# Altium PCB 2011_CurrentIntegrator2.PcbDoc
Units mm, origin at the board's own origin, x right, y up, seen from the top; angles counter-clockwise.
Board outline 95.75 x 56.86 mm, 4 copper layers (Top Layer, Ground layer, Power Layer, Bottom Layer); 113 components, 75 nets, 394 pads, 100 vias.
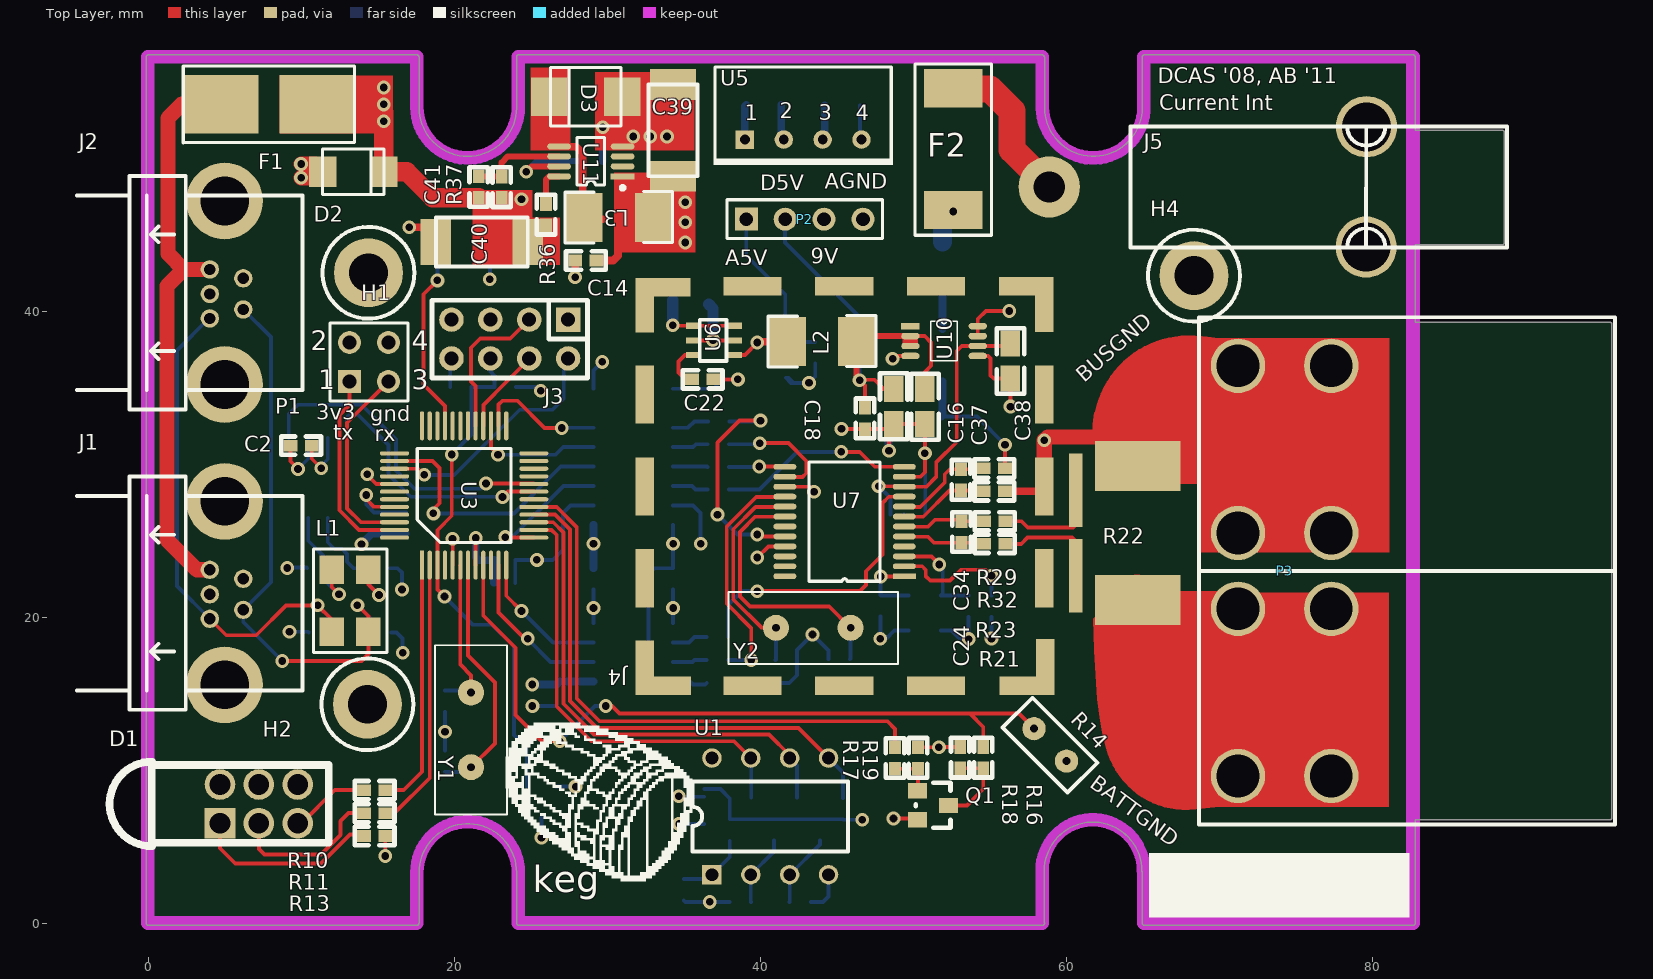
[diagram p0: Top Layer view]
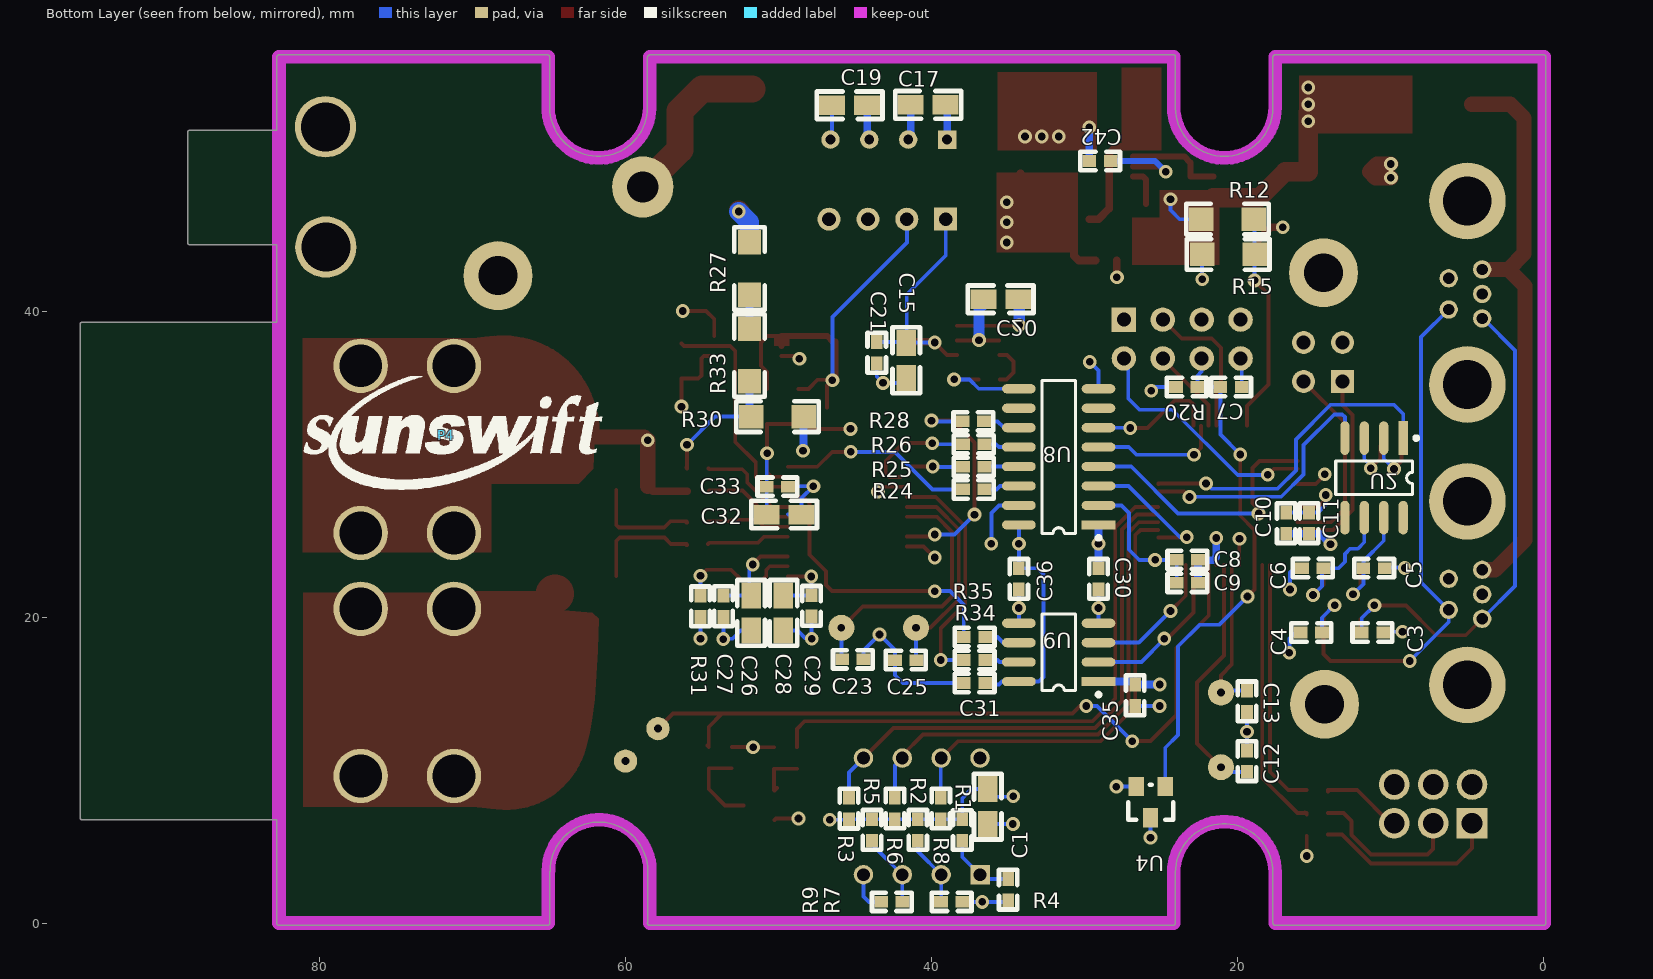
[diagram p1: Bottom Layer view, seen from below]
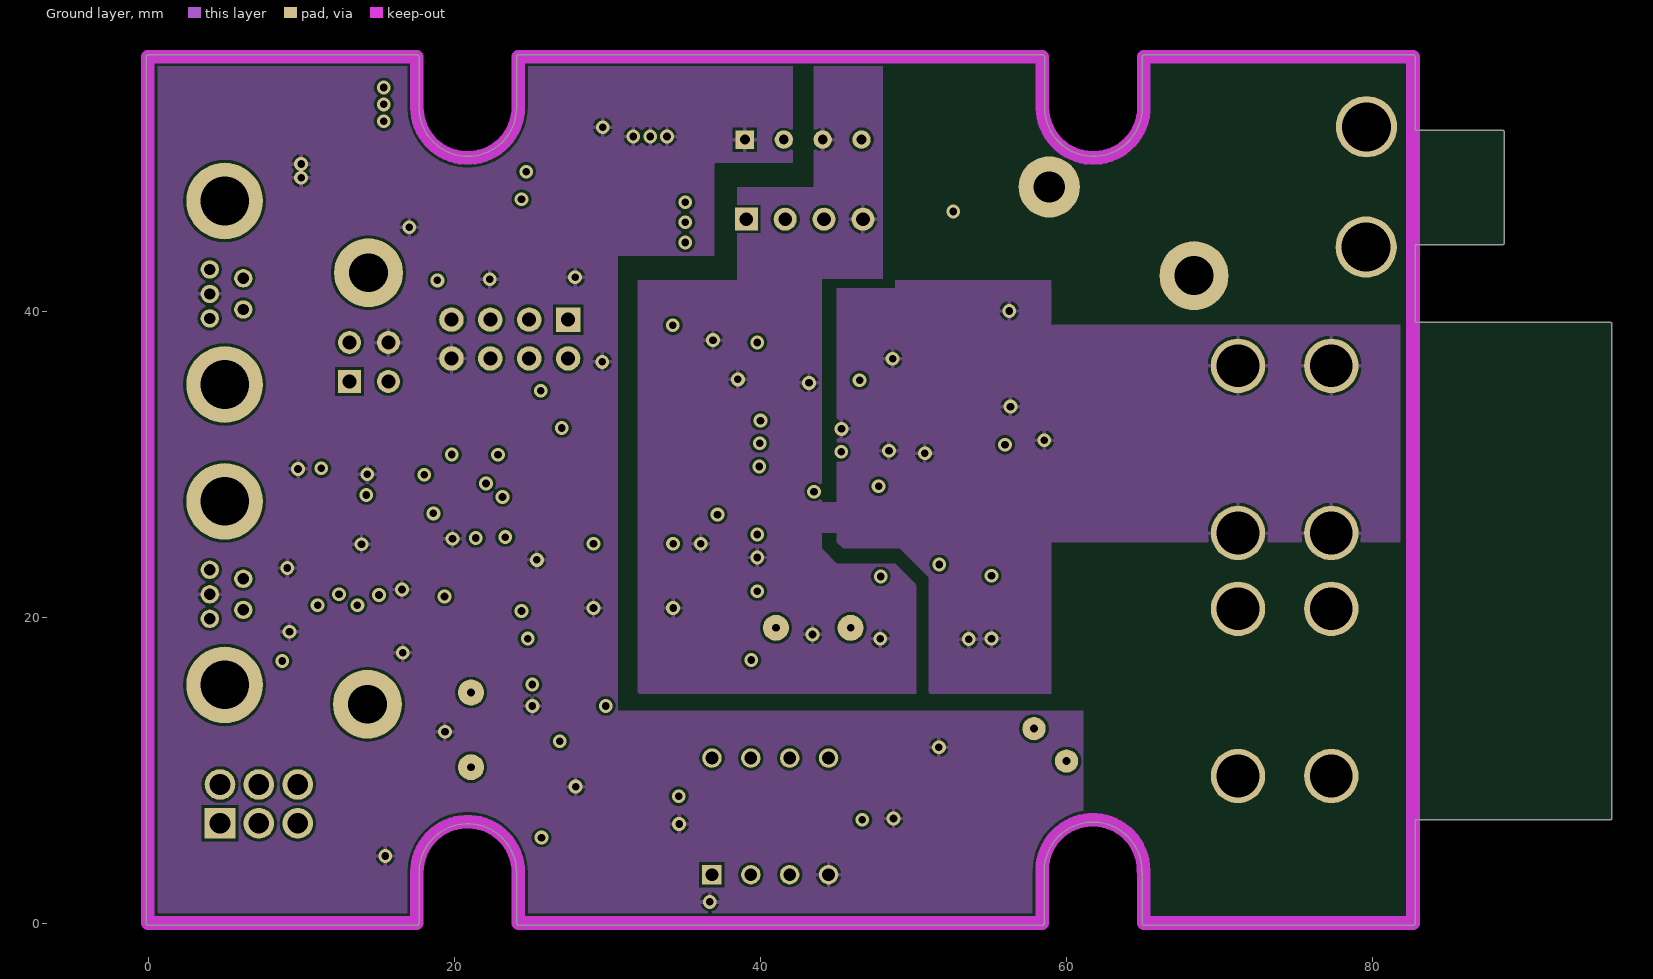
[diagram p2: Ground layer]
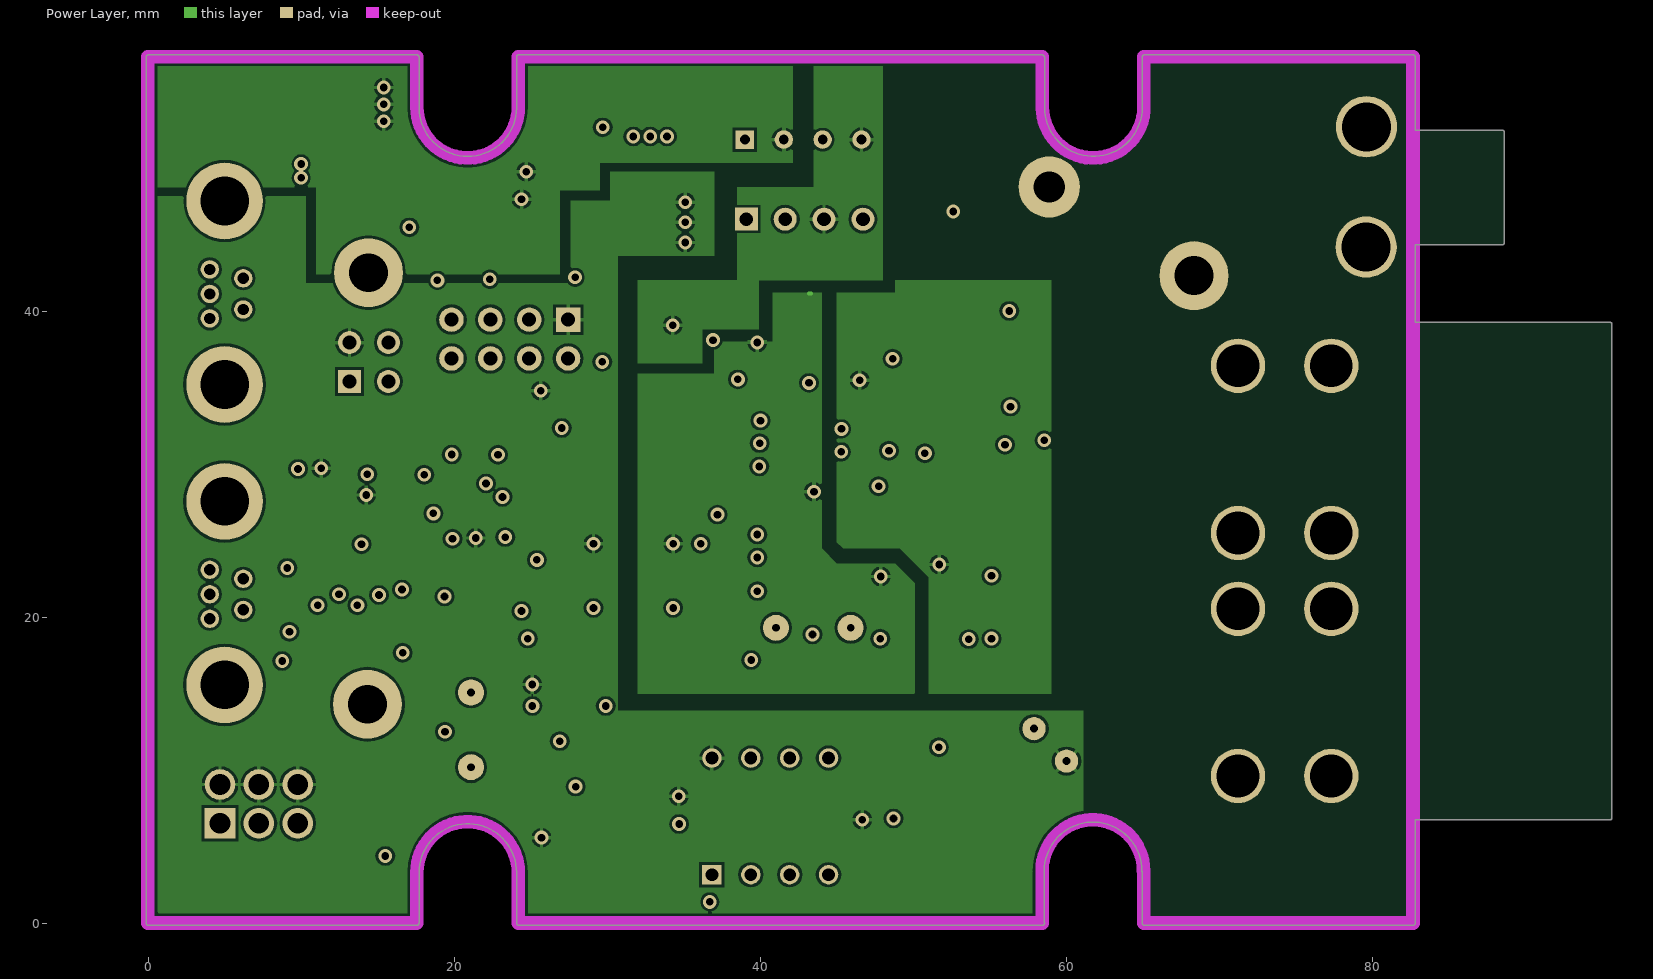
[diagram p3: Power Layer]

## Layer stack, top to bottom
Top Layer: signal copper 0.0356
Dielectric: core 0.32, FR-4, Dk 4.8
Ground layer: signal copper 0.0356
Dielectric: prepreg 0.32, FR-4, Dk 4.8
Power Layer: signal copper 0.0356
Dielectric: core 0.32, FR-4, Dk 4.8
Bottom Layer: signal copper 0.0356

## Board outline
-0.125,0.001 ccw(c0,0) 0,-0.125 17.55,-0.123 ccw(c17.575,0) 17.7,0 17.7,3.291 ccw(c17.575,3.313) 17.702,3.313 cw(c20.89,3.313) 24.077,3.313 ccw(c24.205,3.313) 24.079,3.291 24.079,0 ccw(c24.205,0) 24.205,-0.125 58.445,-0.125 ccw(c58.445,0) 58.57,0 ccw(c58.445,0) 58.545,0.075 58.545,3.313 ccw(c58.42,3.313) 58.532,3.369 ccw(c58.42,3.429) 58.547,3.429 cw(c61.735,3.429) 64.923,3.429 ccw(c65.05,3.429) 64.954,3.346 ccw(c65.075,3.313) 64.949,3.313 64.949,0 ccw(c65.075,0) 65.077,-0.125 ccw(c65.08,0) 65.08,-0.125 82.655,-0.125 ccw(c82.655,0) 82.78,0 ccw(c82.655,0) 82.777,0.028 82.777,6.758 95.504,6.758 ccw(c95.504,6.883) 95.629,6.883 95.629,39.141 ccw(c95.504,39.141) 95.504,39.267 82.777,39.267 82.777,44.325 88.468,44.325 ccw(c88.468,44.45) 88.594,44.45 88.594,51.689 ccw(c88.468,51.689) 88.468,51.814 82.777,51.814 82.777,56.603 ccw(c82.652,56.603) 82.652,56.729 65.075,56.729 ccw(c65.075,56.603) 64.949,56.603 64.949,53.316 ccw(c65.075,53.293) 64.947,53.293 cw(c61.76,53.293) 58.572,53.293 ccw(c58.445,53.293) 58.57,53.315 58.57,56.57 ccw(c58.445,56.57) 58.531,56.661 ccw(c58.42,56.603) 58.42,56.729 24.24,56.729 ccw(c24.2,56.61) 24.075,56.61 24.075,53.3 ccw(c24.2,53.3) 24.077,53.274 cw(c20.89,53.293) 17.702,53.293 ccw(c17.575,53.293) 17.7,53.316 17.7,56.603 ccw(c17.575,56.603) 17.575,56.729 0,56.729 ccw(c0,56.603) -0.125,56.603 -0.125,0.003 ccw(c0,0.003)

## Design rules (kind name [scope] priority, off if disabled: settings)
Clearance [All] p1: gap=0.18
ComponentClearance [All] p1 off: gap=0.18 collisioncheckmode=3 verticalgap=2540 showdistances=TRUE
HoleSize [All] p1: absolutevalues=TRUE maxlimit=10 minlimit=0.025 maxpercent=80.000 minpercent=20.000
HoleToHoleClearance [All] p1: gap=0.18 allowstackedmicrovias=TRUE
MinimumSolderMaskSliver [All] p1: minsoldermaskwidth=0.01
PolygonConnect [All] p1: connectstyle=Relief reliefconductorwidth=0.254 reliefentries=4 polygonreliefangle="90 Angle"
RoutingCorners [All] p1: cornerstyle=45-Degree minsetback=1 maxsetback=1
RoutingVias [All] p1: holewidth=0.5 width=0.9 viastyle="Through Hole" minholewidth=0.4 minwidth=0.4 maxholewidth=0.5 maxwidth=0.9
SilkToSilkClearance [All] p1 off: silktosilkclearance=0.254
SilkscreenOverComponentPads [All] p1 off: minsilkscreentomaskgap=0.254
SolderMaskExpansion [All] p1: expansion=0.102
TestPointUsage [All] p1: valid=0 allowmultiple=FALSE
Testpoint [All] p1: side=15 testpointundercomponent=TRUE minsize=1.016 maxsize=2.54 preferedsize=1.524 minholesize=0 maxholesize=1.016 preferedholesize=0.813 testpointgrid=0.025 style=1023 order=0123456789
Width [All] p1: maxlimit=10 minlimit=0.25 preferedwidth=0.254
17 further rules are at their usual default settings.

## Classes and differential pairs
component class U_3V-Switcher-50mA: C39 C40 C41 C42 D3 L3 R36 R37 U11
component class TopLevel: C1 D1 H1 H2 H3 H4 ID1 P1 Q1 R1 R2 R3 R4 R5 R6 R7 R8 R9 R10 R11 R12 R13 R14 R15 R16 R17 R18 R19 TP1 TP2 TP3 TP4 TP5 TP6 TP7 TP8 TP9 TP10 TP11 TP12 U1
component class MCP3909: 9V A5V C15 C16 C17 C18 C19 C20 C21 C22 C23 C24 C25 C26 C27 C28 C29 C30 C31 C32 C33 C34 C35 C36 C37 C38 F2 J4 J5 L2 P2 P3 R21 R22 R23 R24 R25 R26 R27 R28 R29 R30 R31 R32 R33 R34 R35 TP15 U5 U6 U7 U8 U9 U10 Y2
component class LPC11c14: C7 C8 C9 C10 C11 C12 C13 C14 J3 R20 U3 U4 Y1
component class 3V3-CAN-UNISOLATED: C2 C3 C4 C5 C6 D2 F1 J1 J2 L1 U2

## Components (designator, comment, footprint, x,y, rotation, side; value= is the part's Value field where it differs from the comment)
C1 "0.1uF" 0805 36.336,8.774 r270 bottom
C2 "100nF" 0603 9.3,31.2 r0 top
C3 "100nF" 0603 10.503,19 r0 bottom
C4 "100nF" 0603 14.5,19 r0 bottom
C5 "100nF" 0603 11.797,23.2 r180 bottom
C6 "100nF" 0603 14.403,23.2 r0 bottom
C7 "10nF" 0603 21.14,35.04 r180 bottom
C8 "10nF" 0603 23.993,23.742 r180 bottom
C9 "100nF" 0603 23.993,22.242 r180 bottom
C10 "10nF" 0603 16.843,25.444 r90 bottom
C11 "100nF" 0603 15.343,25.444 r90 bottom
C12 "18pF" 0603 19.4,9.9 r90 bottom
C13 "18pF" 0603 19.4,15.2 r270 bottom
C14 "100nF" 0603 29.3,43.3 r180 top
C15 "10u" 0805 41.656,35.636 r90 bottom
C16 "10u" 0805 48.717,32.625 r90 top
C17 "1uF" 0805 41.37,53.469 r180 bottom
C18 "100nF" 0603 46.838,33.68 r270 top
C19 "10u" 0805 44.215,53.443 r0 bottom
C20 "1uF" 0805 34.341,40.767 r0 bottom
C21 "100nF" 0603 43.586,37.973 r270 bottom
C22 "18pF" 0603 36.932,35.535 r180 top
C23 "18pF" 0603 45.844,17.247 r180 bottom
C24 "2.2nF" 0603 53.137,26.264 r270 top
C25 "100n" 0603 40.992,17.196 r0 bottom
C26 "10u" 0805 51.791,19.126 r90 bottom
C27 "100nF" 0603 53.594,21.412 r270 bottom
C28 "10u" 0805 49.682,19.126 r90 bottom
C29 "100nF" 0603 47.854,20.041 r90 bottom
C30 "100nF" 0603 29.1,21.803 r90 bottom
C31 "100nF" 0603 37.897,15.7 r180 bottom
C32 "10u" 0805 50.786,26.7 r180 bottom
C33 "100nF" 0603 49.378,28.524 r0 bottom
C34 "2.2nF" 0603 53.111,29.667 r270 top
C35 "100nF" 0603 26.7,14.203 r90 bottom
C36 "100nF" 0603 34.3,21.8 r90 bottom
C37 "0.1uF" 0805 50.749,34.9 r270 top
C38 "1uF" 0805 56.337,35.585 r90 top
C39 "4u7 35V" MCCT-CASEC 34.3,48.8 r90 top
C40 "4u7 35V" MCCT-CASEC 24.8,44.5 r180 top
C41 "1n" 0603 21.6,47.403 r90 top
C42 "100nF" 0603 28.3,49.8 r0 bottom
D1 "1882-2781" LED_TRILEVEL 4.699,6.529 r90 top
D2 "12V Transient Suppressor" SMA 13.4,49.1 r0 top
D3 "MBRS130" SMB 28.6,54 r180 top
F1 "125mA/3A" LITTELFUSE-154 7.9,53.5 r0 top
F2 "125mA/3A" LITTELFUSE-154-250V 50.55,45.05 r90 top
H1 "HOLE" M2.5 14.4,42.5 r0 top
H2 "HOLE" M2.5 14.33,14.31 r0 top
H4 "HOLE" M2.5 68.33,42.31 r0 top
J1 "CON5-S" TRIAD5F 6.219,22.509 r90 top
J2 "CON5-S" TRIAD5F 6.219,42.134 r90 top
J3 "LPC SWD Connector" IDC8 27.44,39.44 r180 top
J4 "Shield" BMIS-203-SHIELD 59.15,42.215 r180 top locked
J5 "POWERPOLE(MINI)" POWERPOLE25A 45.283,48.107 r270 top
L1 "CHOKE" Epcos-Choke 12,23.1 r0 top
L2 "CHOKE" 1812 41.779,37.998 r0 top
L3 "330uH" 1812 28.5,46.1 r0 top
P1 "UART" HDR2X2 13.16,35.4 r0 top
P2 "Header 4" HDR1X4 39.08,46 r0 top
P3 "MiniPowerclaw" MiniPowerpole-Hrz 71.204,20.547 r0 top (schematic designator P1)
P4 "SUN_LOGO" SUNSWIFTLOGO 71.7,31.9 r180 bottom (schematic designator P1)
Q1 "ZXM61N02F" SOT23-3 50.268,8.665 r270 top
R1 "0R" 0603 38,5.397 r90 bottom
R2 "0R" 0603 40.9,5.4 r90 bottom
R3 "0R" 0603 45.4,8.197 r270 bottom
R4 "0R" 0603 35,1.5 r90 bottom
R5 "0R" 0603 43.9,5.4 r90 bottom
R6 "0R" 0603 42.4,8.2 r270 bottom
R7 "0R" 0603 38,1.4 r0 bottom
R8 "0R" 0603 39.4,8.2 r270 bottom
R9 "0R" 0603 43.297,1.4 r180 bottom
R10 "1K" 0603 14.1,8.7 r0 top
R11 "1K" 0603 14.103,7.2 r0 top
R12 "100K" 1206 18.971,46 r0 bottom
R13 "1K" 0603 14.1,5.7 r0 top
R14 "NTC, 10k" NTC_EPCOS 60,10.6 r135 top
R15 "20K" 1206 22.329,43.7 r180 bottom
R16 "9k1" 0603 54.556,11.523 r270 top
R17 "100R" 0603 48.8,10.1 r90 top
R18 "0R" 0603 53.056,11.523 r270 top
R19 "10K" 0603 50.3,10.103 r90 top
R20 "10k" 0603 22.64,35.04 r0 bottom
R21 "7k15" 0603 54.61,24.79 r0 top
R22 "BVR, 0R0005" BVR 60.15,36.5 r270 top
R23 "7k15" 0603 54.61,26.264 r0 top
R24 "0R" 0603 37.948,28.346 r180 bottom
R25 "0R" 0603 37.948,29.82 r180 bottom
R26 "0R" 0603 37.948,31.293 r180 bottom
R27 "330k" 1206 51.9,41.071 r90 bottom
R28 "0R" 0603 37.973,32.791 r180 bottom
R29 "7k15" 0603 54.585,29.718 r0 top
R30 "1k2" 1206 48.371,33.1 r0 bottom
R31 "1k" 0603 55.1,21.4 r270 bottom
R32 "7k15" 0603 54.585,28.219 r0 top
R33 "330k" 1206 51.9,35.4 r90 bottom
R34 "0R" 0603 37.897,17.2 r180 bottom
R35 "0R" 0603 37.897,18.7 r180 bottom
R36 "100k" 0603 26,47 r270 top
R37 "1R2" 0603 23.1,47.4 r90 top
U1 "24AA256" DIP8 36.836,3.174 r90 top
U2 "SN65HVD232" SO8 11.1,29.1 r0 bottom
U3 "LPC11C14" Quad48-LPC11c14 17.9,23.4 r90 top
U4 "XC61CN2002MR" SOT23-3 24.735,8.932 r0 bottom
U5 "NKE1209SC" NPSIP4 42.8,51.2 r0 top
U6 "Pq1R30" SOT23-6 35.685,39.035 r270 top
U7 "MCP3909" SOP24-wide 49.403,22.673 r180 top
U8 "IL717" SO16 31.7,30.475 r90 bottom
U9 "IL711" SO8 31.7,17.7 r90 bottom
U10 "LTC6652" "SOP8 - duplicate" 49.804,39.014 r0 top
U11 "LTC1474" TSOP8 31,48.8 r180 top
Y1 "12 MHz" HC49/4H#1 21.1,18.165 r270 top
Y2 "3.579545" HC49/4H#2 37.933,19.304 r0 top

## Footprints (in the part's own frame and the unit in brackets; to place one, negate y for a bottom-side part, rotate by r counter-clockwise, add the part's x,y. Pads: shape width x height; smd on the part's side, far side on the other; paste and mask are expansions set on the pad)
0603 [mil]
  rect 35.43x30 smd: 1(0,0) 2(55,0)
  silkscreen extent -24,-24 79,24
0805 [mm]
  rect 1.7x1.27 smd: 1(0,0) 2(2.286,0)
  silkscreen extent -1,-0.9 3.3,0.9
1206 [mil]
  rect 62.99x60 smd: 1(0,0) 2(135,0)
  silkscreen extent -39,-39 173,39
1812 [mm]
  rect 2.4x3.2 smd: 1(0,0) 2(4.5,0)
  silkscreen extent -1.27,-1.66 5.77,1.7
BMIS-203-SHIELD [mm]
  rect 3.8x1.2 smd: 1(13.67,0.6) ""(7.67,26.7) ""(7.67,0.6) ""(13.67,26.7) ""(19.67,26.7) ""(19.67,0.6)
  rect 1.2x3.57 smd: ""(0.55,25.415) ""(0.6,1.785) ""(26.7,25.515) ""(26.7,1.835)
  rect 1.2x3.8 smd: ""(0.6,19.67) ""(0.6,13.67) ""(0.6,7.67) ""(26.7,7.67) ""(26.7,13.67) ""(26.7,19.67)
  rect 3.57x1.2 smd: ""(1.735,26.7) ""(1.785,0.6) ""(25.465,26.7) ""(25.5,0.65)
BVR [mm]
  rect 4.8x0.9 smd: 1(13.8,0.45) 2(8.2,0.45)
  rect 3.25x5.6 smd: 3(15.375,4.5) 4(6.625,4.5)
DIP8 [mil]
  rect 50x50 hole 33: 1(0,0)
  round 50 hole 33: 2(0,-100) 3(0,-200) 4(0,-300) 5(300,-300) 6(300,-200) 7(300,-100) 8(300,0)
  silkscreen extent 60,-350 240,50
Epcos-Choke [mm]
  rect 1.6x1.85 smd paste+0: 1(0,-4.05)
  rect 1.6x1.85 smd: 2(2.4,-4.05) 3(2.4,0) 4(0,0)
  silkscreen extent -1.2,-5.4 3.6,1.35
HC49/4H#1 [mm]
  round 1.7 hole 0.508: 1(3.085,0) 2(7.965,0)
  silkscreen extent 0,-2.35 11.05,2.35
HC49/4H#2 [mm]
  round 1.7 hole 0.5: 1(3.085,0) 2(7.965,0)
  silkscreen extent 0,-2.35 11.05,2.35
HDR1X4 [mm] "Connector; Header; 4 Position"
  rect 1.5x1.5 hole 0.9: 1(0,0)
  round 1.5 hole 0.9: 2(2.54,0) 3(5.08,0) 4(7.62,0)
  silkscreen extent -1.27,-1.27 8.89,1.27
HDR2X2 [mm] "Connector; Header; 2x2 Position"
  rect 1.5x1.5 hole 0.9: 1(0,0)
  round 1.5 hole 0.9: 2(0,2.54) 3(2.54,0) 4(2.54,2.54)
  silkscreen extent -1.27,-1.27 3.81,3.81
IDC8 [mm]
  rect 1.6x1.6 hole 0.914: 1(0,0)
  round 1.6 hole 0.914: 2(0,2.54) 3(2.54,0) 4(2.54,2.54) 5(5.08,0) 6(5.08,2.54) 7(7.62,0) 8(7.62,2.54)
  silkscreen extent -1.27,-1.27 8.89,3.81
LED_TRILEVEL [mm]
  rect 2x2 hole 1.346: 1(0,0)
  round 2 hole 1.346: 2(0,-2.54) 3(0,-5.08) 4(2.54,-5.08) 5(2.54,-2.54) 6(2.54,0)
  silkscreen extent -1.49,-7.11 4.03,7.21
LITTELFUSE-154 [mm]
  rect 5x3.81 smd: 1(-3.185,0) 2(3.185,0)
  silkscreen extent -5.6,-2.51 5.6,2.5
LITTELFUSE-154-250V [mm]
  rect 2.5x3.81 smd: 1(1.55,-2.05) 2(9.5,-2.05)
  silkscreen extent -0.1,-4.56 11.1,0.45
M2.5 [mm]
  round 4.5 hole 2.54: 1(0,0)
  silkscreen extent -3,-3 3,3
MCCT-CASEC [mm]
  rect 2x3 smd: 1(0,0) 2(6,0)
  silkscreen extent 0,-1.6 6,1.6
MiniPowerpole-Hrz [mil]
  round 140 hole 110: 1(0,195) 1(0,625) 1(240,195) 1(240,625) 2(0,-430) 2(0,0) 2(240,-430) 2(240,0)
  silkscreen extent -100,-555 970,750
NPSIP4 [mm]
  rect 1.2x1.2 hole 0.635: 1(-3.81,0)
  round 1.2 hole 0.635: 2(-1.27,0) 3(1.27,0) 4(3.81,0)
  silkscreen extent -5.85,-1.65 5.86,4.75
NTC_EPCOS [mil]
  round 60 hole 20: 1(0,0) 2(118.11,0)
  silkscreen extent -59,-53 177,55
POWERPOLE25A [mm]
  round 4 hole 2.032: 1(0,13.589)
  silkscreen extent -3.95,18.9 3.95,43.5
Quad48-LPC11c14 [mm]
  rect 1.9x0.27 smd: 1(0,0)
  oval 1.9x0.27 smd: 2(0,-0.5) 3(0,-1) 4(0,-1.5) 5(0,-2) 6(0,-2.5) 7(0,-3) 8(0,-3.5) 9(0,-4) 10(0,-4.5) 11(0,-5) 12(0,-5.5) 25(9.1,-5.5) 26(9.1,-5) 27(9.1,-4.5) 28(9.1,-4) 29(9.1,-3.5) 30(9.1,-3) 31(9.1,-2.5) 32(9.1,-2) 33(9.1,-1.5) 34(9.1,-1) 35(9.1,-0.5) 36(9.1,0)
  oval 0.27x1.9 smd: 13(1.8,-7.3) 14(2.3,-7.3) 15(2.8,-7.3) 16(3.3,-7.3) 17(3.8,-7.3) 18(4.3,-7.3) 19(4.8,-7.3) 20(5.3,-7.3) 21(5.8,-7.3) 22(6.3,-7.3) 23(6.8,-7.3) 24(7.3,-7.3) 37(7.3,1.8) 38(6.8,1.8) 39(6.3,1.8) 40(5.8,1.8) 41(5.3,1.8) 42(4.8,1.8) 43(4.3,1.8) 44(3.8,1.8) 45(3.3,1.8) 46(2.8,1.8) 47(2.3,1.8) 48(1.8,1.8)
  silkscreen extent 1.48,-5.81 7.61,0.32
SMA [mm]
  rect 1.8x2 smd: A(-2,0) K(2,0)
  silkscreen extent -2,-1.48 2,1.48
SMB [mm]
  rect 2.4x2.5 smd: A(-2.385,0) K(2.385,0)
  silkscreen extent -2.28,-1.9 2.3,1.9
SO8 [mm]
  rect 0.6x2.2 smd: 1(-1.905,-2.6)
  oval 0.6x2.2 smd: 2(-0.635,-2.6) 3(0.635,-2.6) 4(1.905,-2.6) 5(1.905,2.6) 6(0.635,2.6) 7(-0.635,2.6) 8(-1.905,2.6)
  silkscreen extent -2.88,-2.72 2.5,1.1
SO16 [mm]
  rect 0.6x2.2 smd: 1(-4.445,-2.6)
  oval 0.6x2.2 smd: 2(-3.175,-2.6) 3(-1.905,-2.6) 4(-0.635,-2.6) 5(0.635,-2.6) 6(1.905,-2.6) 7(3.175,-2.6) 8(4.445,-2.6) 9(4.445,2.6) 10(3.175,2.6) 11(1.905,2.6) 12(0.635,2.6) 13(-0.635,2.6) 14(-1.905,2.6) 15(-3.175,2.6) 16(-4.445,2.6)
  silkscreen extent -5.42,-2.72 5,1.1
"SOP8 - duplicate" [mm]
  rect 1.2x0.42 smd: 1(0,0)
  oval 1.2x0.42 smd: 2(0,-0.65) 3(0,-1.3) 4(0,-1.95) 5(4.4,-1.95) 6(4.4,-1.3) 7(4.4,-0.65) 8(4.4,0)
  silkscreen extent 1.33,-2.28 3.07,0.33
SOP24-wide [mm]
  rect 1.5x0.38 smd: 1(0,0)
  oval 1.5x0.38 smd: 2(0,-0.65) 3(0,-1.3) 4(0,-1.95) 5(0,-2.6) 6(0,-3.25) 7(0,-3.9) 8(0,-4.55) 9(0,-5.2) 10(0,-5.85) 11(0,-6.5) 12(0,-7.15) 13(7.8,-7.15) 14(7.8,-6.5) 15(7.8,-5.85) 16(7.8,-5.2) 17(7.8,-4.55) 18(7.8,-3.9) 19(7.8,-3.25) 20(7.8,-2.6) 21(7.8,-1.95) 22(7.8,-1.3) 23(7.8,-0.65) 24(7.8,0)
  silkscreen extent 1.58,-7.48 6.22,0.33
SOT23-3 [mm]
  rect 1x1.25 smd: 1(0,0) 2(1.905,0) 3(0.965,2.032)
  silkscreen extent -0.51,-0.13 2.41,2.16
SOT23-6 [mm]
  rect 0.4x0.9 smd: 1(0,-0.1) 2(0.95,-0.1) 3(1.9,-0.1) 4(1.9,2.65) 5(0.95,2.65) 6(0,2.65)
  silkscreen extent -0.4,0.35 2.3,2.1
SUNSWIFTLOGO [mm] "Sunswift Logo"
  silkscreen extent -9.32,-3.58 10.19,3.81
TRIAD5F [mil]
  round 196.85 hole 125: 0(-273,48) 0(199,48)
  round 47.24 hole 29: 1(0,0) 2(23,86) 3(-40,86) 4(-103,86) 5(-80,0)
  silkscreen extent -337,-152 263,428
TSOP8 [mm]
  rect 1.55x0.4 smd: 1(0,0)
  oval 1.55x0.4 smd: 2(0,-0.65) 3(0,-1.3) 4(0,-1.95) 5(4.15,-1.95) 6(4.15,-1.3) 7(4.15,-0.65) 8(4.15,0)
  silkscreen extent -0.13,-2.52 2.98,0.87

## Part data
C1 C2 C3 C4 C5 C6 C7 C8 C9 C10 C11 C12 C13 C14 C15 C16 C17 C18 C19 C20 C21 C22 C23 C24 C25 C26 C27 C28 C29 C30 C31 C32 C33 C34 C35 C36 C37 C38 C41 C42: library part CAP, "Capacitor"
C39 C40: library part "Cap Pol3", "Polarized Capacitor (Surface Mount)"
D1: library part LED-TRILEVEL, "Three level LED"
D2: library part DIODE, "Diode"
D3: library part "D SCHOTTKY", "Schottky Diode"
F1 F2: library part FUSE2, "Fuse"
H1 H2 H4: "Hole"
J1 J2: "Connector, 2 pin, with shield @ S"
J3: library part LPCLink_Connector
J4: library part Socket, "Socket"
J5: library part CON1
L2: library part INDUCTOR, "Inductor"
L3: library part Inductor, "Inductor"
P1: library part "Header 2X2", "Header, 2-Pin, Dual row"
P2: "Header, 4-Pin"
P3: library part SUN_LOGO
Q1: "1.7A, 20V N-Channel Enhancement mode FET"
R1 R2 R3 R4 R5 R6 R7 R8 R9 R10 R11 R12 R13 R15 R16 R17 R18 R19 R20 R21 R23 R24 R25 R26 R28 R29 R30 R31 R32 R34 R35 R36 R37: library part RES1, "Resistor"
R14: library part "Res Varistor", "Varistor (Voltage-Sensitive Resistor)"
R22: library part BVR
R27 R33: library part RES1
U2: "3.3V CAN Transciever"
U3: library part LPC11C14_Full
U4: library part XC61F, "SOT23 reset generator"
U5: library part LME1209S, "Isolated 250mW Single Output"
U7: "Energy Measurement IC"
U8: "Isoloop IL717 - www.nve.com"
U9: "IL711 Optical Isolator"
U11: "Step-down converter"
Y1 Y2: library part CRYSTAL, "Crystal"

## Free pads (board coordinates)
  round 4 hole 3.2: 0(79.574,44.177) 0(79.6,52.036)

## Via types
v1: diameter 0.9, hole 0.5, Top Layer to Bottom Layer, 95 vias
v2: diameter 0.9, hole 0.5, Top Layer to Bottom Layer, tented both sides, 5 vias

## Nets (pads, with @x,y where several pads share a name; then routed paths per layer and width w, separated by ;. In a path a pad name is that pad's centre, name@x,y a point inside that pad or via, vN(x,y) a via of type N, cw(c..) or ccw(c..) an arc to the next point about the centre after c; other vN are vias at no path point)
2V5REF: C32.2 C33.1 C38.2 U7.10 U10.6 | length 20.4
  Top Layer w0.25: v1(47.727,28.55) 49.376,28.55 U7.10 50.85,28.523 51.486,29.159 51.486,30.099 52.832,31.445 52.832,37.389 53.158,37.714 U10.6 56.18,37.714 C38.2
  Bottom Layer w0.25: C32.2 48.5,27.776 v1(47.727,28.55) 49.352,28.55 C33.1 ; 49.352,26.695 49.378,26.721
3V3: C1.1 C2.2 C8.2 C9.2 C10.2 C11.2 C14.1 C30.2 C35.2 C39.1 D1.4 D1.5 D1.6 J3.1 L3.2 P1.2 R1.2 R2.2 R3.2 R5.2 R6.2 R8.2 R14.1 R20.2 U1.8 U2.3 U3.8 U3.44 U4.3 U8.1 U9.1 U11.1 | length 48.9
  Top Layer w0.25: C2.2 10.697,30.349 v1(11.32,29.725) ; v1(14.255,27.983) 14.255,27.709 14.756,27.209 16.091,27.209 U3.44 ; U3.8 21.4,25.167 v1(21.404,25.171)
  Top Layer w0.5: C14.1 30.4,43.3 30.7,43.6 30.7,45.4 31.4,46.1 L3.2 33.7,46.1 34.7,47.1 v1(35.1,47.1) ; C39.1@34,48.8 C39.1@34.2,49
  Bottom Layer w0.25: v1(11.32,29.725) 11.32,29.903 11.735,30.317 U2.3 ; v1(14.255,27.983) 14.255,27.349 14.764,26.841 C11.2 C10.2 ; R20.2 25.412,35.04 v1(25.654,34.798) ; v2(25.7,5.6) U4.3 ; v2(34.668,8.304) 34.698,8.274 C1.1@36.336,8.274 ; C1.1 37.387,8.774 38,8.161 R1.2 45.394,6.794 45.421,6.767 v1(46.657,6.767)
  Bottom Layer w0.5: v1(21.404,25.171) 21.404,23.935 21.615,23.724 22.578,23.724 C8.2 C9.2 ; v1(25.1,15.6) C35.2 26.895,15.795 U9.1 ; C30.2 U8.1 v1(29.1,24.8)
  other v1: 35.1,44.479 35.1,45.8
9V: C19.2 C20.1 P2.3 U5.4 U6.1 U6.6 | length 8
  Top Layer w0.25: v1(34.28,39.065) 34.31,39.035 U6.1 U6.6
  Bottom Layer w0.25: C19.2 46.501,51.309 U5.4
  Bottom Layer w0.75: v1(34.28,39.065) C20.1@34.28,40.706
12V: C17.1 C40.1 C41.1 C42.1 D2.K F1.2 R12.2 R36.2 R37.1 U5.2 U11.7 | length 30
  Top Layer w0.4: R37.1 24.4,47.4 v1(24.4,47.3) ; v1(24.7,49.1) 25.05,49.45 U11.7
  Top Layer w1.25: F1.2@12.599,52.7 11.799,53.5 F1.2 14.9,53.5 15.4,53 D2.K 16.9,49.1 18.597,47.403 C41.1
  Bottom Layer w0.25: R12.2 23.8,46 24.4,46.6 v1(24.4,47.3)
  Bottom Layer w0.4: v1(24.7,49.1) 25.4,49.8 C42.1
  Bottom Layer w0.5: C17.1 41.37,51.36 U5.2
  other v1: 15.4,52.4 15.4,53.5 15.4,54.6
12V_MEASURE: R12.1 R15.2 U3.33 | length 14.5
  Top Layer w0.25: v1(18.9,42) 18,41.1 18,35.2 19.4,33.8 U3.33
  Bottom Layer w0.25: v1(18.9,42) R15.2 18.9,45.929 R12.1
/RESET: C7.1 J3.6 R20.1 U3.3 U4.1 | length 33.7
  Top Layer w0.25: v1(19.369,21.347) 18.9,21.816 U3.3 18.9,25.682 19.841,26.623 v1(19.841,30.626)
  Bottom Layer w0.25: v1(19.369,21.347) 21.216,19.5 22.5,19.5 23.9,18.1 23.9,12.3 24.735,11.465 U4.1 ; v1(19.841,30.626) 21.14,31.926 C7.1 R20.1 22.64,35.76 22.36,36.04 J3.6
A5V: C16.2 C18.1 C26.2 C27.1 C37.1 L2.2 P2.2 U7.3 U10.2 U10.3 | length 35.1
  Top Layer w0.25: C18.1 46.838,35.128 v1(46.482,35.484) 46.457,35.509 47.447,35.509 48.045,34.911 C16.2 ; U7.3@49.403,23.958 51.175,23.958 v1(51.689,23.444) ; U10.2 50.739,38.364 51.156,37.948 51.156,36.424 50.749,36.017 C37.1
  Top Layer w0.381: v1@46.457,35.509 46.279,35.687 L2.2 46.457,37.998 46.823,38.364 U10.2 U10.3 U10.3@49.799,37.719
  Bottom Layer w0.25: P2.2 41.62,44.48 46.482,39.618 v1(46.482,35.484) ; v1(51.689,23.444) 51.918,23.216 51.918,21.539 C26.2 C27.1
CAN_H: C3.2 J1.4 J2.4 L1.1 | length 34
  Top Layer w0.25: J1.4 5.113,18.815 7.064,18.815 9.02,20.772 v1(11.077,20.772) 12,19.849 L1.1
  Bottom Layer w0.25: J1.4 1.882,22.046 1.882,37.43 3.969,39.518 J2.4 ; v1(11.077,20.772) 11.9,19.949 C3.2
CAN_L: C4.1 J1.5 J2.5 L1.2 | length 37
  Top Layer w0.25: v1(8.764,17.139) 13.943,17.139 14.4,17.597 L1.2 14.4,20.06 v1(13.676,20.784)
  Bottom Layer w0.25: J2.5 8.027,38.294 8.027,22.285 J1.5 6.219,19.685 v1(8.764,17.139) ; v1(13.676,20.784) 14.5,19.96 C4.1
D5V: C15.2 C21.1 C28.2 C29.2 C31.2 C36.2 L2.1 P2.1 U6.4 U7.1 U7.15 U8.16 U9.8 | length 38.9
  Top Layer w0.25: U6.4 38.989,37.135 v1(39.802,37.948) ; U7.15 43.232,28.523 43.5,28.255 v1(43.5,28.2) ; v1(47.858,22.658) U7.1@49.403,22.658
  Top Layer w0.5: v1(39.802,37.948) 39.853,37.998 L2.1
  Power Layer w0.25: 43.18,41.148 43.307,41.148
  Bottom Layer w0.25: U8.16 v1(34.3,24.8) C36.2 33.097,23.197 32.7,22.8 32.7,16.1 33.005,15.795 U9.8 35.405,15.795 35.6,15.6 36.4,15.6 C31.2 ; P2.1 39.08,43.62 41.631,41.069 C15.2@41.631,37.948 ; v1(39.802,37.948) C15.2@41.631,37.948 ; C21.1 41.707,37.973 C15.2 C15.2@41.631,37.948 ; v1(47.858,22.658) C29.2@47.858,21.442 ; C29.2@47.904,21.488 C29.2@47.858,21.442 ; C28.2 47.879,21.412 C29.2 C29.2@47.858,21.442
GND: C1.2 C2.1 C3.1 C4.2 C5.2 C6.2 C7.2 C8.1 C9.1 C10.1 C11.1 C12.2 C13.2 C14.2 C17.2 C30.1 C35.1 C39.2 C40.2 C42.2 D2.A D3.A J1.3 J2.3 J3.8 P1.4 Q1.2 R4.1 R7.1 R9.1 R13.2 R15.1 R18.1 R19.2 U1.4 U2.2 U3.5 U3.41 U4.2 U5.1 U8.2 U8.8 U9.4 U11.4 | length 64.1
  Top Layer w0.25: C2.1 9.3,30.184 v1(9.8,29.684) ; v1(14.326,29.337) 14.326,29.286 14.912,28.7 U3.41 ; R13.2 15.5,5.697 v1(15.5,4.4) ; v1(19.888,25.121) 19.914,25.095 19.9,25.082 U3.5 ; v1(29.667,36.678) v1@29.693,36.678 ; v1(48.696,6.85) 50.178,6.85 Q1.2 ; R19.2 v1(51.664,11.5) 51.668,11.503 51.687,11.523 R18.1
  Top Layer w0.5: v1(17.069,45.466) 17.834,45.466 C40.2 ; v1(27.9,42.2) 27.903,42.203 C14.2
  Top Layer w1: v1(10,48.7) 11,48.7 D2.A 10.9,49.6 v1(10,49.6) ; D2.A@11.2,49.3 D2.A@11.3,49.2
  Bottom Layer w0.25: v1(9.236,19.051) 10.452,19.051 C3.1 ; v1@9.296,23.251 10.349,23.251 C5.2 C5.2@10.337,23.263 ; v1(9.8,29.684) 10.465,30.349 U2.2 ; C6.2 16.297,23.2 16.588,22.909 v1(16.588,21.807) ; C4.2 16.233,19 16.632,18.601 v1(16.632,17.673) ; v1(19.394,12.517) v1@19.4,12.511 ; C12.2 v1@19.4,12.511 ; C13.2 v1@19.4,12.511 ; C7.2 19.743,36.823 J3.8 ; v1(22.329,42.081) R15.1 ; C9.1 C8.1 v1(25.4,23.742) 26.442,23.742 27.1,24.4 27.1,26.8 27.6,27.3 U8.2 ; v1(25.106,14.2) 25.103,14.203 C35.1 ; U4.2 v2(27.932,8.932) ; U9.4 v1(29.1,20.6) C30.1 ; U8.8 29.1,36.11 v1(29.667,36.678) ; v2(34.691,6.488) C1.2 ; R4.1 35.1,1.4 v1(36.7,1.4) R7.1 ; C17.2@39.083,53.469 C17.2@39.114,53.5 ; R9.1 44.1,1.4 44.456,1.756 U1.4
  Bottom Layer w0.5: v1(13.945,24.765) 14.623,25.444 C10.1 ; C42.2 29.7,49.803 v1(29.7,52) ; U5.1 38.99,53.374 C17.2
  other v1: 9.093,23.216 31.7,51.4 32.8,51.4 33.9,51.4
ISOGND: C15.1 C16.1 C18.2 C19.1 C20.2 C21.2 C22.1 C23.2 C25.2 C26.1 C27.2 C28.1 C29.1 C31.1 C32.1 C33.2 C36.1 C37.2 C38.1 J4.@58.55,28.545 P2.4 P3.1 R22.4 R30.1 R31.2 R32.2 U5.3 U6.2 U6.5 U7.11 U7.21 U8.9 U8.15 U9.5 U10.4 U10.5 U10.7 U10.8 | length 93.8
  Top Layer w0.25: U6.2 v1@36.891,38.085 ; v1(36.906,38.1) v1@36.891,38.085 ; C22.1 v1(38.532,35.535) ; U6.5 v1@36.891,38.085 ; v1(39.8,23.9) 40.523,24.623 40.723,24.623 U7.21 ; v1(45.3,32.3) 45.317,32.283 C18.2 48.376,32.283 C16.1 ; v1(48.4,30.873) C16.1@48.4,32.285 ; v1(48.641,36.881) 48.825,37.064 U10.4 ; C16.1@48.729,32.614 C37.2 v1@50.749,30.912 ; U7.11 50.458,29.173 50.749,29.464 v1(50.749,30.709) ; U10.5 54.884,37.064 55.042,36.906 55.042,35.789 55.245,35.585 C38.1 v1(56.337,33.757) ; U10.7 U10.8 54.204,39.472 54.737,40.005 v1(56.261,40.005) ; 62.53,31.644 62.535,31.648
  Top Layer w0.254: C16.1@48.4,32.285 C16.1@48.729,32.614 ; 61.898,32.922 cw(c67.988,32.143) 61.908,33 cw(c67.988,32.143) 68.767,38.233
  Top Layer w0.5: R32.2 58.224,28.219 58.55,28.545 J4.@58.6,28.595
  Top Layer w1: v1(58.547,31.553) v1@58.55,31.55 ; J4.@58.55,28.545 v1@58.55,31.55 ; 62.382,31.775 58.775,31.775 v1@58.55,31.55
  Bottom Layer w0.25: U9.5 v1(34.3,20.6) C36.1 ; U8.9 36.92,34.92 37.535,35.535 v1(38.532,35.535) ; v1(36.1,24.8) 36.1,26.8 ; C31.1 41.887,15.7 42.389,16.202 C25.2 42.389,17.856 v1(43.405,18.872) 44.447,17.831 C23.2 ; 42.672,35.306 41.986,35.306 C15.1 41.834,35.636 42.164,35.306 v1(43.18,35.306) 43.586,35.712 C21.2 ; v1(47.828,18.593) v1@47.854,18.618 ; C29.1 v1@47.854,18.618 ; v1@48.371,30.902 v1(48.4,30.873) ; C28.1 48.743,19.126 48.235,18.618 v1@47.854,18.618 ; v1@50.724,30.734 v1(50.749,30.709) 50.775,30.683 C33.2 50.775,26.711 C32.1 ; C26.1 52.476,19.126 53.01,18.593 v1@53.594,18.593 ; C27.2 v1@53.594,18.593 ; v1(53.619,18.567) v1@53.594,18.593 ; v1(55.1,18.6) R31.2 ; 35.6,27.3 U8.15 35.6,27.3 ; 35.6,27.3 36.1,26.8 ; 35.6,27.3 36.1,26.8
  Bottom Layer w0.5: U5.3 44.215,51.345 C19.1 ; v1@48.371,30.902 R30.1
  Bottom Layer w0.75: C20.2@36.627,40.437 36.906,40.157 v1(36.906,38.1)
LEDRED: R10.2 U3.1 | length 16.4
  Top Layer w0.25: R10.2 16.7,8.7 17.9,9.9 U3.1
LEDYLW: R11.2 U3.2 | length 17.9
  Top Layer w0.25: R11.2@15.497,7.1 R11.2@15.597,7.2 ; R11.2 R11.2@15.597,7.2 ; R11.2@15.627,7.23 R11.2@15.597,7.2 ; U3.2 18.4,9.5 16.1,7.2 R11.2@15.597,7.2
NetC5_1: C5.1 L1.4 U2.7 | length 7.6
  Top Layer w0.25: L1.4 12,21.967 v1(12.473,21.494)
  Bottom Layer w0.25: U2.7 10.465,24.994 11.797,23.662 C5.1 11.797,22.17 v1(12.473,21.494)
NetC6_1: C6.1 L1.3 U2.6 | length 9.2
  Top Layer w0.25: L1.3 14.4,22.13 v1(15.084,21.446)
  Bottom Layer w0.25: U2.6 11.735,24.892 12.158,24.469 12.666,24.469 13.004,24.131 13.004,23.623 13.427,23.2 C6.1 14.507,23.096 14.507,22.024 v1(15.084,21.446)
NetC22_2: C22.2 U6.3 | length 2.9
  Top Layer w0.25: C22.2 35.103,35.535 34.646,35.992 34.646,36.703 35.077,37.135 U6.3
NetC24_1: C24.1 R23.1 U7.6 | length 5.8
  Top Layer w0.25: U7.6@49.403,25.908 50.952,25.908 51.41,26.365 53.035,26.365 C24.1 ; 53.543,26.264 C24.1 ; R23.1 C24.1
NetC24_2: C24.2 R21.1 U7.5 | length 5.4
  Top Layer w0.25: U7.5@49.403,25.258 50.942,25.258 51.333,24.867 C24.2 54.534,24.867 R21.1
NetC34_1: C34.1 R29.1 U7.8 | length 6.9
  Top Layer w0.25: U7.8@49.403,27.208 50.449,27.208 52.045,28.804 52.045,29.337 52.375,29.667 C34.1 ; C34.1@53.442,29.667 C34.1 ; R29.1 54.534,29.667 C34.1
NetC34_2: C34.2 R32.1 U7.7 | length 6.3
  Top Layer w0.25: U7.7@49.403,26.558 50.637,26.558 52.349,28.27 ; 52.4,28.27 C34.2 ; C34.2@53.035,28.194 C34.2 ; C34.2@53.442,28.27 C34.2 ; R32.1 54.534,28.27 C34.2
NetC41_2: C41.2 R37.2 U11.6 | length 6.3
  Top Layer w0.4: C41.2@21.6,48.797 R37.2 23.1,49.7 23.5,50.1 U11.6
NetD1_1: D1.1 R13.1 | length 12.2
  Top Layer w0.25: D1.1 4.699,4.901 5.7,3.9 11.3,3.9 13.2,5.8 R13.1@14.1,5.8
NetD1_2: D1.2 R11.1 | length 10.3
  Top Layer w0.25: D1.2 7.239,4.861 7.6,4.5 11.292,4.5 12.573,5.781 12.573,6.673 13.1,7.2 R11.1
NetD1_3: D1.3 R10.1 | length 5.4
  Top Layer w0.25: D1.3 10.029,6.529 12.2,8.7 R10.1@14.003,8.7 ; R10.1@13.979,8.724 R10.1@14.003,8.7 ; R10.1 R10.1@14.003,8.7 ; R10.1@14.103,8.6 R10.1@14.003,8.7
NetD3_K: D3.K L3.1 U11.5 | length 10.4
  Top Layer w0.5: D3.K 26.85,53.365 U11.5 26.866,50.734 27.966,50.734 28.4,50.3 28.4,46.7 29.1,46 29.7,46
NetF1_1: F1.1 J1.2 J2.2 | length 37.5
  Top Layer w1: J1.2 3.196,23.093 1.243,25.047 1.243,41.633 2.328,42.718 ; J2.2 2.328,42.718 ; F1.1 2.194,53.5 1.297,52.603 1.297,43.75 2.328,42.718
NetF2_1: F2.1 R27.2 | length 2.4
  Top Layer w1.25: F2.1@52.5,46.5 F2.1
  Bottom Layer w1.25: R27.2 51.9,45.804 v1(52.6,46.504)
NetF2_2: F2.2 J5.1 | length 11.3
  Top Layer w1.75: F2.2@51.74,54.508 54.991,54.508 56.439,53.061 56.439,50.54 J5.1
NetP1_1: P1.1 U3.47 | length 12.8
  Top Layer w0.25: P1.1 13.16,33.86 12.5,33.2 12.5,26.986 13.786,25.7 U3.47
NetP1_3: P1.3 U3.46 | length 12.9
  Top Layer w0.25: P1.3 13,32.7 13,27.1 13.9,26.2 U3.46
NetP3_1: P3.2 R22.3 | length 13.5
  Top Layer w0.254: 62.634,11.838 ccw(c67.818,12.788) 68.767,7.605
  Top Layer w2.5: R22.3@64.6,21.55 R22.3@64.63,21.52 ; R22.3@65.703,20.447 P3.2@70.704,20.447 ; 67.461,9.525 67.461,9.714
NetQ1_1: Q1.1 R17.1 R19.1 | length 3.2
  Top Layer w0.25: R17.1 50.297,10.1 R19.1 50.3,8.697 Q1.1 Q1.1@50.1,8.833
NetQ1_3: Q1.3 R16.2 R18.2 | length 5.6
  Top Layer w0.25: Q1.3 53.494,7.7 54.556,8.762 R16.2 R18.2
NetR1_1: R1.1 R4.2 U1.1 | length 4.7
  Bottom Layer w0.25: R4.2 35.003,2.9 36.562,2.9 U1.1 38,4.338 R1.1
NetR2_1: R2.1 R7.2 U1.2 | length 4.6
  Bottom Layer w0.25: R7.2 39.376,1.421 U1.2 40.9,4.698 R2.1
NetR3_1: R3.1 U1.5 U3.16 | length 35.4
  Top Layer w0.25: U3.16 26.586,26.7 27.566,25.72 27.566,14.52 29.32,12.766 42.484,12.766 U1.5
  Bottom Layer w0.25: U1.5 45.4,9.85 R3.1
NetR5_1: R5.1 R9.2 U1.3 | length 4.8
  Bottom Layer w0.25: R9.2 41.916,1.416 U1.3 43.9,5.158 R5.1
NetR6_1: R6.1 U1.6 U3.15 | length 32.7
  Top Layer w0.25: U3.15 26.472,26.2 27.132,25.54 27.132,14.34 29.14,12.332 40.568,12.332 41.916,10.984 U1.6 U1.6@41.81,10.794
  Bottom Layer w0.25: U1.6 42.4,10.31 R6.1
NetR8_1: R8.1 U1.7 U3.14 | length 29.5
  Top Layer w0.25: U3.14 26.359,25.7 26.698,25.361 26.698,14.161 28.961,11.898 38.272,11.898 U1.7
  Bottom Layer w0.25: U1.7 39.4,10.77 R8.1
NetR14_2: R14.2 R16.1 U3.9 | length 49.5
  Top Layer w0.25: U3.9 21.9,20.1 24,18 24,13.6 25.7,11.9 v2(26.9,11.9) ; v1(29.9,14.2) 30.3,14.2 30.8,13.7 53.7,13.7 ; R16.1@54.656,11.623 R16.1 54.556,12.844 53.7,13.7 ; R14.2 56.9,13.7 53.7,13.7
  Bottom Layer w0.25: v2(26.9,11.9) 29.2,14.2 v1(29.9,14.2)
NetR17_2: R17.2 U3.17 | length 38.7
  Top Layer w0.25: U3.17 26.7,27.2 28,25.9 28,14.7 29.5,13.2 46.7,13.2 ; 48.047,13.2 46.7,13.2 ; R17.2@48.803,11.5 R17.2 48.8,12.7 48.3,13.2 46.7,13.2
NetR21_2: R21.2 R22.1 | length 7.7
  Top Layer w0.25: R21.2@55.982,24.714 R21.2@56.007,24.714 ; 56.587,24.79 R21.2 57.044,24.79 57.45,25.197 60.376,25.197 60.6,24.973 R22.1
NetR22_2: R22.2 R23.2 | length 7.9
  Top Layer w0.25: R23.2@55.982,26.187 R23.2@56.007,26.187 ; 56.747,26.264 R23.2 57.052,26.264 57.466,25.849 60.419,25.849 60.6,26.031 R22.2
NetR24_1: R24.1 U7.12 | length 12.9
  Top Layer w0.25: v1(45.288,30.8) 46.492,30.8 47.469,29.823 U7.12
  Bottom Layer w0.25: R24.1 39.946,28.346 42.4,30.8 v1(45.288,30.8)
NetR24_2: R24.2 U8.14 | length 2.3
  Bottom Layer w0.25: U8.14 35.53,28.57 35.754,28.346 R24.2
NetR25_1: R25.1 U7.13 | length 3.7
  Top Layer w0.25: v1(39.929,29.845) 41.581,29.845 U7.13
  Bottom Layer w0.25: R25.1 39.903,29.82 v1(39.929,29.845)
NetR25_2: R25.2 U8.13 | length 2.3
  Bottom Layer w0.25: U8.13 36.53,29.84 R25.2
NetR26_1: R26.1 U7.14 | length 7.5
  Top Layer w0.25: v1(39.954,31.369) 41.831,31.369 43,30.2 43,29.4 42.758,29.158 U7.14@42.037,29.158
  Bottom Layer w0.25: R26.1 39.929,31.293 39.954,31.318 v1(39.954,31.369)
NetR26_2: R26.2 U8.12 | length 2.3
  Bottom Layer w0.25: U8.12 35.61,31.11 35.793,31.293 R26.2
NetR27_1: R27.1 R33.2 | length 2.2
  Bottom Layer w0.5: R33.2 R27.1
NetR28_1: R28.1 U7.20 | length 16
  Top Layer w0.25: v1(37.2,26.7) 37.2,31.4 38.642,32.842 v1(40.005,32.842) ; v1(39.8,25.4) 39.927,25.273 U7.20
  Bottom Layer w0.25: v1(37.2,26.7) 38.5,25.4 v1(39.8,25.4) 39,25.4 ; R28.1 39.98,32.791 40.005,32.817 v1(40.005,32.842)
NetR28_2: R28.2 U8.11 | length 2.4
  Bottom Layer w0.25: U8.11 35.28,32.38 35.691,32.791 R28.2
NetR29_2: R29.2 R30.2 R33.1 | length 10
  Top Layer w0.25: v1@55.982,30.861 R29.2 ; v1(55.982,31.267) R29.2 ; R29.2@56.032,29.769 R29.2
  Bottom Layer w0.25: R30.2 54.149,33.1 v1(55.982,31.267)
  Bottom Layer w0.5: R30.2 51.9,33.2 R33.1
NetR31_1: R31.1 U7.2 | length 8.1
  Top Layer w0.25: U7.2 50.577,23.323 50.8,23.1 50.8,22.7 51.1,22.4 52.4,22.4 53.1,23.1 54.7,23.1 v1(55.1,22.7)
  Bottom Layer w0.25: R31.1 v1(55.1,22.7)
NetR34_2: R34.2 U9.7 | length 2.3
  Bottom Layer w0.25: U9.7 35.565,17.065 35.7,17.2 R34.2
NetR35_2: R35.2 U9.6 | length 2.4
  Bottom Layer w0.25: U9.6 35.335,18.335 35.7,18.7 R35.2
NetR36_1: R36.1 U11.8 | length 2.5
  Top Layer w0.4: R36.1 26,48.6 26.2,48.8 U11.8
NetU2_1: U2.1 U3.20 | length 21.5
  Top Layer w0.25: v1(22.079,28.73) 25.17,28.73 U3.20 U3.20@25.19,28.71
  Bottom Layer w0.25: U2.1 9.195,33.277 9.791,33.873 13.949,33.873 16.205,31.617 16.205,29.591 17.409,28.387 21.736,28.387 v1(22.079,28.73)
NetU2_4: U2.4 U3.19 | length 17.1
  Top Layer w0.25: v1(23.154,27.855) 23.499,28.2 U3.19
  Bottom Layer w0.25: U2.4 13.005,33.068 13.187,33.25 13.699,33.25 15.697,31.252 15.697,29.326 17.157,27.866 23.143,27.866 v1(23.154,27.855)
NetU3_11: U3.11 U9.2 | length 10.7
  Top Layer w0.25: U3.11 22.9,21.3 22.9,20.3 24.6,18.6 v1(24.8,18.6)
  Bottom Layer w0.25: v1(24.8,18.6) 24.8,18.565 26.3,17.065 U9.2
NetU3_12: U3.12 U9.3 | length 9
  Top Layer w0.25: U3.12 23.4,21.4 v1(24.4,20.4)
  Bottom Layer w0.25: v1(24.4,20.4) 26.465,18.335 U9.3
NetU3_13: U3.13 U8.3 | length 9
  Top Layer w0.25: v1(23.333,25.231) 23.365,25.2 U3.13
  Bottom Layer w0.25: v1(23.333,25.231) 23.791,25.231 27.13,28.57 U8.3
NetU3_26: U3.26 U8.6 | length 8.4
  Top Layer w0.25: U3.26 22.9,33.892 23.146,34.138 24.13,34.138 25.909,32.36 v1(27.026,32.36)
  Bottom Layer w0.25: v1(27.026,32.36) 27.046,32.38 U8.6
NetU3_27: U3.27 U8.5 | length 8.5
  Top Layer w0.25: U3.27 22.4,31.071 v1(22.863,30.607)
  Bottom Layer w0.25: v1(22.863,30.607) 26.62,30.607 27.122,31.11 U8.5
NetU3_38: U3.38 U8.4 | length 18
  Top Layer w0.25: U3.38 18.58,30.2 19.033,29.747 19.033,27.447 18.639,27.053 v1(18.639,26.778)
  Bottom Layer w0.25: v1(18.639,26.778) 23.9,26.778 26.962,29.84 U8.4
NMCLR: R35.1 U7.9 | length 19
  Top Layer w0.25: v1(39.8,21.7) 46.5,21.7 46.9,22.1 46.9,23 47.974,24.074 47.974,27.451 48.39,27.867 49.397,27.867 U7.9@49.403,27.867
  Bottom Layer w0.25: R35.1 37.897,20.797 38.8,21.7 v1(39.8,21.7)
OSC1: C25.1 U7.17 Y2.1 | length 14.2
  Top Layer w0.25: Y2.1 40.096,19.304 38.234,21.166 38.234,25.748 39.694,27.208 U7.17@41.603,27.208
  Bottom Layer w0.25: C25.1 41.018,17.221 Y2.1
OSC2: C23.1 U7.18 Y2.2 | length 17.7
  Top Layer w0.25: U7.18@41.603,26.558 39.658,26.558 38.668,25.568 38.668,21.346 39.314,20.7 44.502,20.7 Y2.2
  Bottom Layer w0.25: C23.1 45.898,17.301 Y2.2
PGA: R34.1 U7.16 | length 15.5
  Top Layer w0.25: v1(39.4,17.2) 39.4,19.3 37.8,20.9 37.8,25.928 39.73,27.858 U7.16@41.603,27.858
  Bottom Layer w0.25: R34.1 v1(39.4,17.2)
TCLK: J3.3 U3.29 | length 9.8
  Top Layer w0.25: U3.29 21.4,35.1 21.1,35.4 21.1,37.6 21.7,38.2 23.66,38.2 J3.3
TDO: J3.4 U3.28 | length 5.9
  Top Layer w0.25: U3.28 21.907,32.507 21.907,33.863 23.422,35.378 ; 23.6,35.556 23.422,35.378 ; J3.4 24.9,36.856 23.422,35.378
TMS: J3.2 U3.39 | length 16
  Top Layer w0.25: U3.39 17.645,29.7 v1(18.038,29.306)
  Bottom Layer w0.25: v1(18.038,29.306) 18.065,29.28 20.004,29.28 24.277,33.553 26.416,33.553 27.153,34.29 27.153,36.613 J3.2
XTALIN: C13.1 U3.6 Y1.1 | length 10.4
  Top Layer w0.25: U3.6@20.387,23.387 U3.6 20.4,16.9 21.1,16.2 Y1.1
  Bottom Layer w0.25: C13.1 20.98,15.2 Y1.1
XTALOUT: C12.1 U3.7 Y1.2 | length 16.4
  Top Layer w0.25: U3.7 20.9,17.5 22.656,15.744 22.656,11.756 Y1.2
  Bottom Layer w0.25: C12.1 19.41,9.89 20.79,9.89 Y1.2
pads on no net: H1.1 H2.1 H4.1 J1.0 J1.1 J2.0 J2.1 J3.5 J3.7 J4.1 J4.@32.45,16.7 J4.@32.45,22.545 J4.@32.45,28.545 J4.@32.45,34.545 J4.@32.45,40.38 J4.@33.65,41.565 J4.@33.685,15.515 J4.@39.48,15.515 J4.@39.48,41.615 J4.@45.48,15.515 J4.@51.48,15.515 J4.@51.48,41.615 J4.@57.365,41.615 J4.@57.415,15.515 J4.@58.6,16.8 J4.@58.55,22.545 J4.@58.55,34.545 J4.@58.55,40.43 U2.5 U2.8 U3.4 U3.10 U3.18 U3.21 U3.22 U3.23 U3.24 U3.25 U3.30 U3.31 U3.32 U3.34 U3.35 U3.36 U3.37 U3.40 U3.42 U3.43 U3.45 U3.48 U7.4 U7.19 U7.22 U7.23 U7.24 U8.7 U8.10 U10.1 U11.2 U11.3

## Polygon pours and split planes (outlines as drawn)
ISOGND on Ground layer "isognd2" (solid, pour order 1000): 44,27.5 45.5,27.5 45.5,25.5 44,25.5
GND on Ground layer "cangnd" (solid, pour order 1001): 0.1,56.624 17.558,56.624 17.7,56.482 17.7,52.5 17.7,52 19.5,50.2 19.6,50.1 22.2,50.1 22.2,50.3 24,52.1 24.3,52.4 24.3,56.624 42.1,56.624 41.9,56.624 42.1,56.624 42.1,49.7 37.1,49.7 37,49.6 37,43.6 30.7,43.6 30.7,17.4 30.7,13.9 61.1,13.9 61.1,6.8 60.6,6.8 59,5.2 58.403,4.603 58.403,0.009 24.279,0.009 24.188,0.1 24.3,0.212 24.3,3.9 24.3,4.6 22.3,6.6 22.2,6.7 19.9,6.7 19.8,6.7 17.9,4.8 17.558,4.458 17.558,0.023 0.098,0.023 0.095,0.02 0.095,56.619 0.1,56.624
ISOGND on Ground layer "isognd1" (solid, pour order 1002): 43.5,56.624 43.5,55.1 43.5,48.1 38.5,48.1 38.5,42 32.1,42 32,42 32,15.1 32.1,15 49.7,15 49.7,22.6 48.8,23.5 48.4,23.5 45.1,23.5 45,23.6 45,23.5 44,24.5 44,42.1 48,42.1 48,56.524 47.9,56.624 43.5,56.624
ISOGND on Ground layer "isognd12" (solid, pour order 1003): 49.7,22.6 50.1,22.2 50.2,22.1 50.2,15 49.5,15 49.4,15.1 49.5,15.2 49.5,22.8
ISOGND on Ground layer "isognd2" (solid, pour order 1004): 45,41.5 48.8,41.5 48.8,42 59.1,42 59,41.9 59,38.4 59,39 59.1,39.1 81.8,39.1 81.8,24.9 59,24.9 59,15 51.1,15 51,15.1 51,22.6 49.1,24.5 45.4,24.5 45,24.9 45,41.5
12V on Power Layer "can12v" (solid, pour order 1005): 0.1,56.624 17.4,56.624 17.4,52.3 19.1,50.6 19.4,50.3 22.2,50.3 22.3,50.3 24.2,52.2 24.188,52.212 24.188,56.624 42.1,56.624 42.1,49.7 37,49.7 29.5,49.7 29.5,47.9 26.9,47.9 26.9,42.4 16.4,42.4 11,42.4 11,48.1 0.1,48.1 0.1,56.624
3V3 on Power Layer "3v3" (solid, pour order 1006): 37,49.1 30.2,49.1 30.2,47.2 27.6,47.2 27.6,41.7 27.5,41.8 10.3,41.8 10.3,47.5 -0.017,47.5 -0.017,0.02 0.063,0.1 17.6,0.1 17.6,4.2 19.9,6.5 20.1,6.5 22,6.5 24,4.5 24.2,4.5 24.2,0.112 24.188,0.1 24.288,0.2 58.403,0.2 58.403,4.203 58.7,4.5 59,4.8 59,5.7 59.4,5.7 60.1,6.4 60.3,6.6 61.1,6.6 61.1,13.9 30.7,13.9 30.7,43.6 37,43.6
9V on Power Layer "9v" (solid, pour order 1007): 43.5,56.624 43.5,48.1 38.5,48.1 38.5,41.6 38.5,42 31.9,42 32,42 32,36.6 36.2,36.6 36.2,39.4 39.9,39.4 39.9,42 48,42 48,56.624 43.5,56.624
9V on Power Layer "9v2" (solid, pour order 1008): 39.9,39.659 39.9,38.8 36.219,38.8 36.2,38.819 36.1,38.919 36.1,39.5
D5V on Power Layer "d5v" (solid, pour order 1009): 32,35.9 32,14.9 32,15 50.2,15 50.1,15.1 50.1,22.2 48.8,23.5 45,23.5 44,24.5 44,41.2 40.8,41.2 40.8,38 37.1,38 37,38.1 37,35.9
A5V on Power Layer "a5v" (solid, pour order 1010): 45,41.2 48.8,41.2 48.8,42 59,42 59,15 50.8,15 51,15 51,22.2 51,22.4 51,22.6 49.1,24.5 45.5,24.5 45.4,24.5 45,24.9 45,41.2

## Keep-outs
Keep-Out Layer:
  lines w0.889: -0.017,0.02 17.558,0.023 ; -0.017,0.023 -0.017,56.624 17.558,56.624 17.558,53.319 ; 17.558,0.02 17.558,3.334 cw(c20.873,3.334) 24.188,3.334 24.188,0.02 58.428,0.02 ; 17.558,53.314 ccw(c20.873,53.314) 24.188,53.314 24.188,56.624 43,56.624 58.403,56.624 ; 58.403,0.009 58.403,3.322 ; 58.403,3.449 cw(c61.718,3.449) 65.033,3.449 ; 58.428,53.2 58.428,56.591 ; 58.428,53.314 ccw(c61.743,53.314) 65.058,53.314 65.058,56.624 82.633,56.624 ; 65.058,0.02 65.058,3.334 ; 65.063,0.02 82.638,0.02 82.638,56.624

## Other copper
Top Layer:
  rectangle net 12V: 8.6,51.6 16,55.4
  rectangle net A5V: 49.3,37.7 50.3,38.5
  rectangle net 12V: 21.2,43 25.1,47.9
  rectangle net 12V: 23.9,43 26.9,46.1
  rectangle net GND: 29.2,50.5 35.7,55.6
  rectangle net 3V3: 30.429,43.812 35.763,49.047
  rectangle net NetD3_K: 25,50.5 27.6,55.9
  rectangle net ISOGND: 68.767,24.219 81.114,38.233
  rectangle net NetP3_1: 68.767,7.605 81.079,21.618
  rectangle net NetP3_1: 65.082,10.146 71.308,19.773
  region net NetP3_1: 69.16,7.868 69.964,7.631 69.079,7.515 68.435,7.437 68.451,7.499 67.585,7.499 67.467,7.616 66.32,7.616 66.039,7.897 65.593,7.897 65.055,8.435 64.75,8.435 63.977,9.208 63.93,9.208 63.93,9.255 63.181,10.005 63.181,10.497 62.712,10.965 62.516,11.665 62.319,12.464 62.199,13.218 62.016,14.627 61.808,17.839 61.818,17.658 61.818,17.745 61.804,17.783 61.804,17.856 61.734,19.887 62.174,20.288 68.525,20.835
  region net ISOGND: 61.697,31.644 61.727,32.614 61.823,33.358 62.2,33.735 62.2,34.49 62.509,34.799 62.509,35.125 63.059,35.675 63.059,35.898 63.539,36.378 63.539,36.43 63.608,36.43 64.14,36.962 64.14,36.979 64.191,36.979 64.621,37.408 64.878,37.408 65.153,37.683 65.427,37.683 65.719,37.975 66.234,37.975 66.457,38.198 67.195,38.198 67.315,38.318 68.563,38.376 69.184,38.317 69.956,38.229 69.957,38.157 69.135,28.843 69.015,28.723 63.059,28.723 62.097,29.684 62.052,31.293 61.874,31.293

## Silkscreen, mask and mechanical layers (free items; w line width, h text height)
Top Overlay:
  rectangle: 65.393,0.372 82.411,4.597
  region: 137 vertices and 55 holes, not listed, extent 23.368,2.743 35.56,13.106
  text "DCAS '08, AB '11" at 65.955,54.869 h1
  text "Current Int" at 66.064,53.102 h1
  text "AGND" at 44.2,48 h1
  text "D5V" at 40,47.9 h1
  text "9V" at 43.3,43.1 h1
  text "A5V" at 37.7,43 h1
  text "BUSGND" at 61.163,35.281 h1 r41.14
  text "3v3" at 11,32.9 h1
  text "gnd" at 14.5,32.8 h1
  text "tx" at 12.1,31.6 h1
  text "rx" at 14.8,31.5 h1
  text "BATTGND" at 61.443,8.941 h1 r323.46
  text "keg" at 25.146,1.448 h3
Top Solder:
  rectangle: 61.824,31.166 63.754,32.258
  rectangle: 66.904,19.177 68.021,20.091
  rectangle: 62.7,31.6 67.513,35.086
  region: 68.381,8.41 67.265,8.308 67.062,8.235 66.485,8.432 66.199,8.48 65.477,8.655 65.045,9.087 64.709,9.087 64.197,9.599 64.197,9.663 64.181,9.663 63.525,10.319 63.525,10.591 63.045,11.071 63.045,11.695 62.774,11.967 62.56,12.786 62.359,14.044 61.974,16.964 61.734,19.887 67.274,19.887 67.426,20.038 68.028,19.436 68.028,10.549
  region: 65.982,37.303 65.735,37.259 65.007,37.128 64.6,36.721 64.28,36.721 63.815,36.256 63.713,36.256 63.218,35.761 63.218,35.587 62.718,35.086 62.7,35.086 62.7,34.864 62.229,34.394 62.229,33.536 61.924,33.23 61.924,31.34 65.051,32.896
  lines w0.254: 61.985,31.929 cw(c67.044,32.397) 66.576,37.457 ; 62.705,13.281 ccw(c67.471,13.074) 67.265,8.308
  lines w2.5: 64.6,30.3 64.6,34.216 66.706,36.322 70.704,36.322 ; 64.614,12.531 64.63,21.52 ; 64.757,12.418 67.461,9.714 ; 67.461,9.525 70.704,9.525
Mechanical 1:
  lines w0.25: 0,0 17.575,0.003 ; 0,0.003 0,56.603 17.575,56.603 17.575,53.298 ; 17.575,0 17.575,3.313 ; 24.2,53.3 24.2,56.61 ; 24.205,3.313 24.205,0 58.445,0 ; 24.205,56.603 58.42,56.603 ; 58.42,0 58.42,3.313 ; 58.445,53.18 58.445,56.57 ; 65.075,0 65.075,3.313 ; 65.075,53.293 65.075,56.603 82.652,56.603 82.652,51.689 88.468,51.689 88.468,44.45 82.652,44.45 82.652,39.141 95.504,39.141 95.504,7.087 ; 65.08,0 82.655,0 ; 82.652,0 82.652,6.883 95.504,6.883 95.504,39.116
  lines w0.254: 17.575,3.313 cw(c20.89,3.313) 24.205,3.313 ; 17.575,53.293 ccw(c20.89,53.293) 24.205,53.293 ; 58.42,3.429 cw(c61.735,3.429) 65.05,3.429 ; 58.445,53.293 ccw(c61.76,53.293) 65.075,53.293

## Text inside footprints (layer, text, board x,y; h text height)
P1: Top Overlay "1" at 11.128,34.892 h1.27; Top Overlay "2" at 10.62,37.432 h1.27; Top Overlay "4" at 17.224,37.432 h1.27; Top Overlay "3" at 17.224,34.892 h1.27
U5: Top Overlay "1" at 38.978,52.451 h1; Top Overlay "2" at 41.264,52.578 h1; Top Overlay "3" at 43.804,52.451 h1; Top Overlay "4" at 46.217,52.451 h1